# Altium PCB thru-cal-board.PcbDoc
Units mm, origin at the board's own origin, x right, y up, seen from the top; angles counter-clockwise.
Board outline 36 x 16 mm, 4 copper layers (Top Layer, Mid-Layer 1, Mid-Layer 2, Bottom Layer), stack 1.105 mm thick; 2 components, 2 nets, 10 pads, 164 vias.
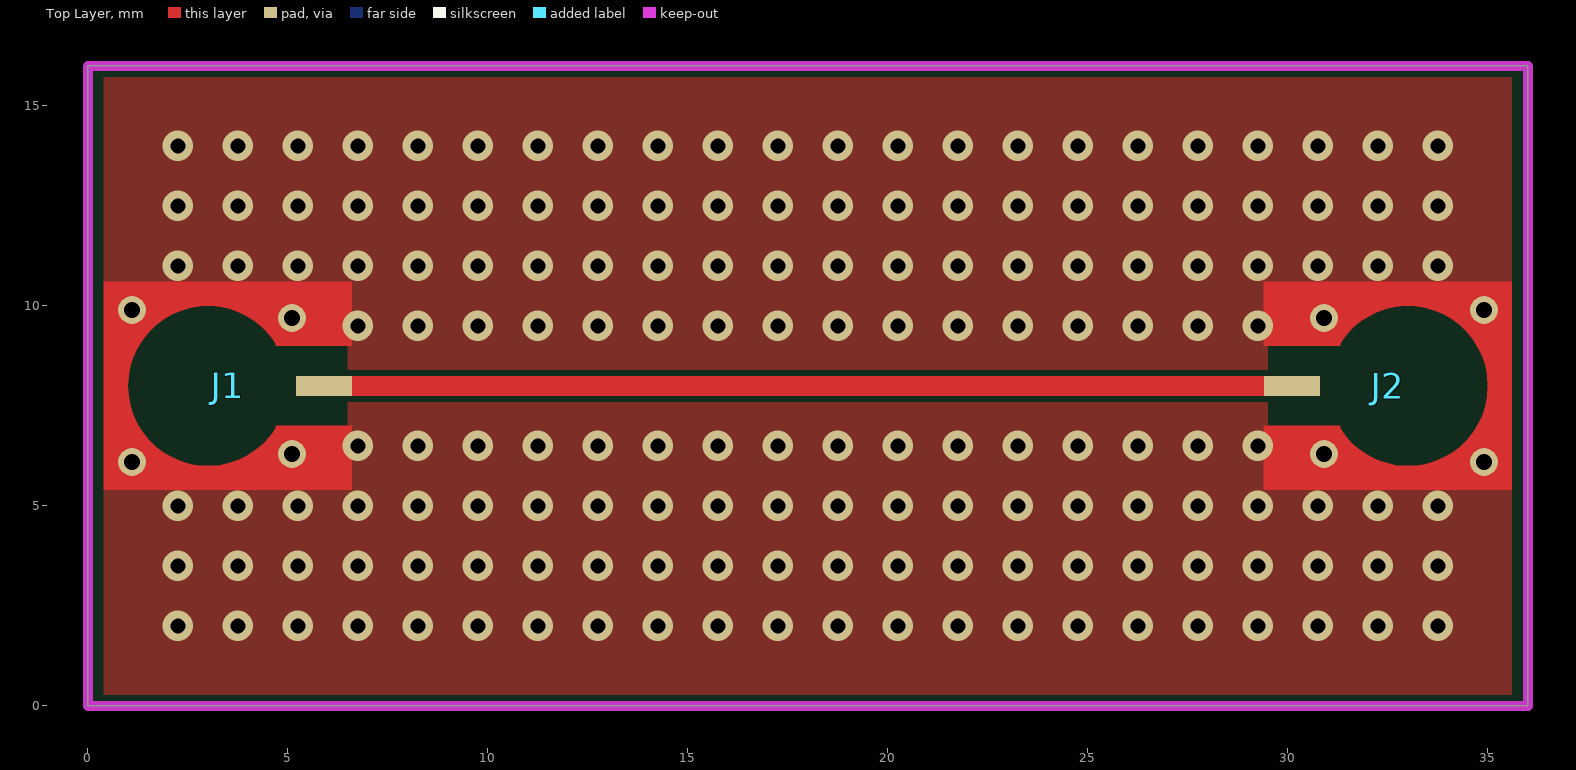
[diagram p0: Top Layer view]
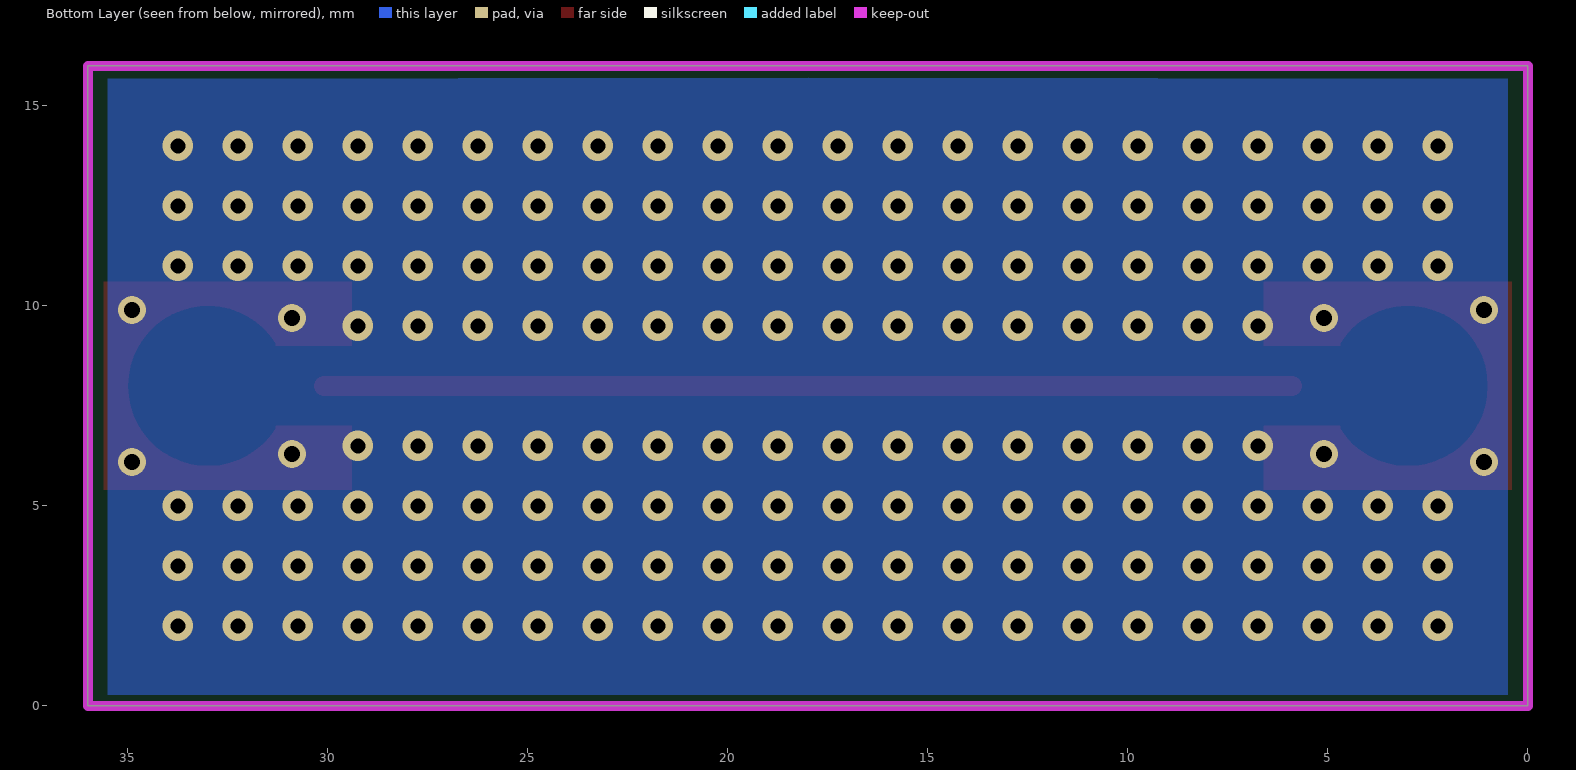
[diagram p1: Bottom Layer view, seen from below]
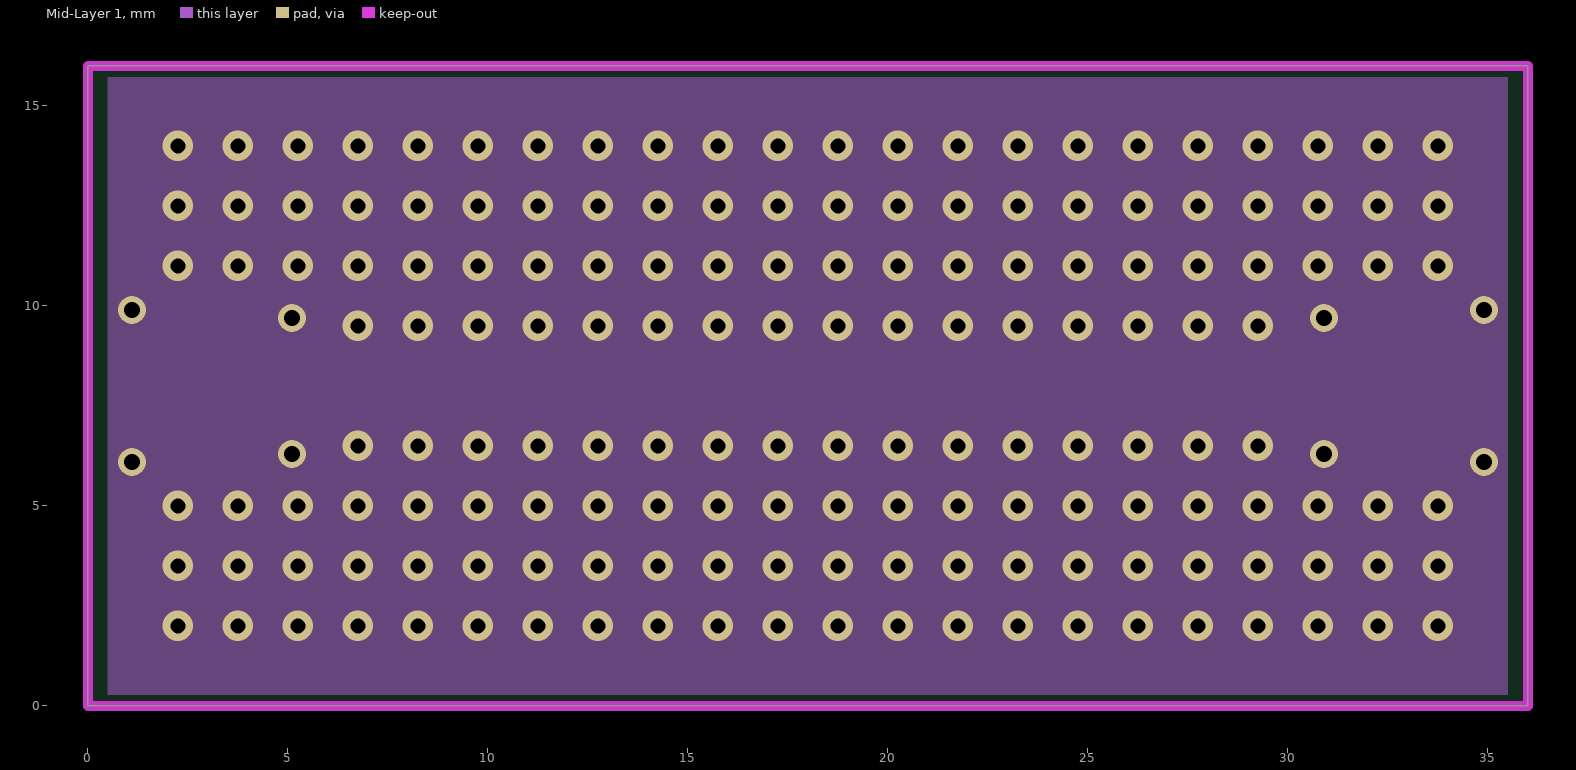
[diagram p2: Mid-Layer 1]
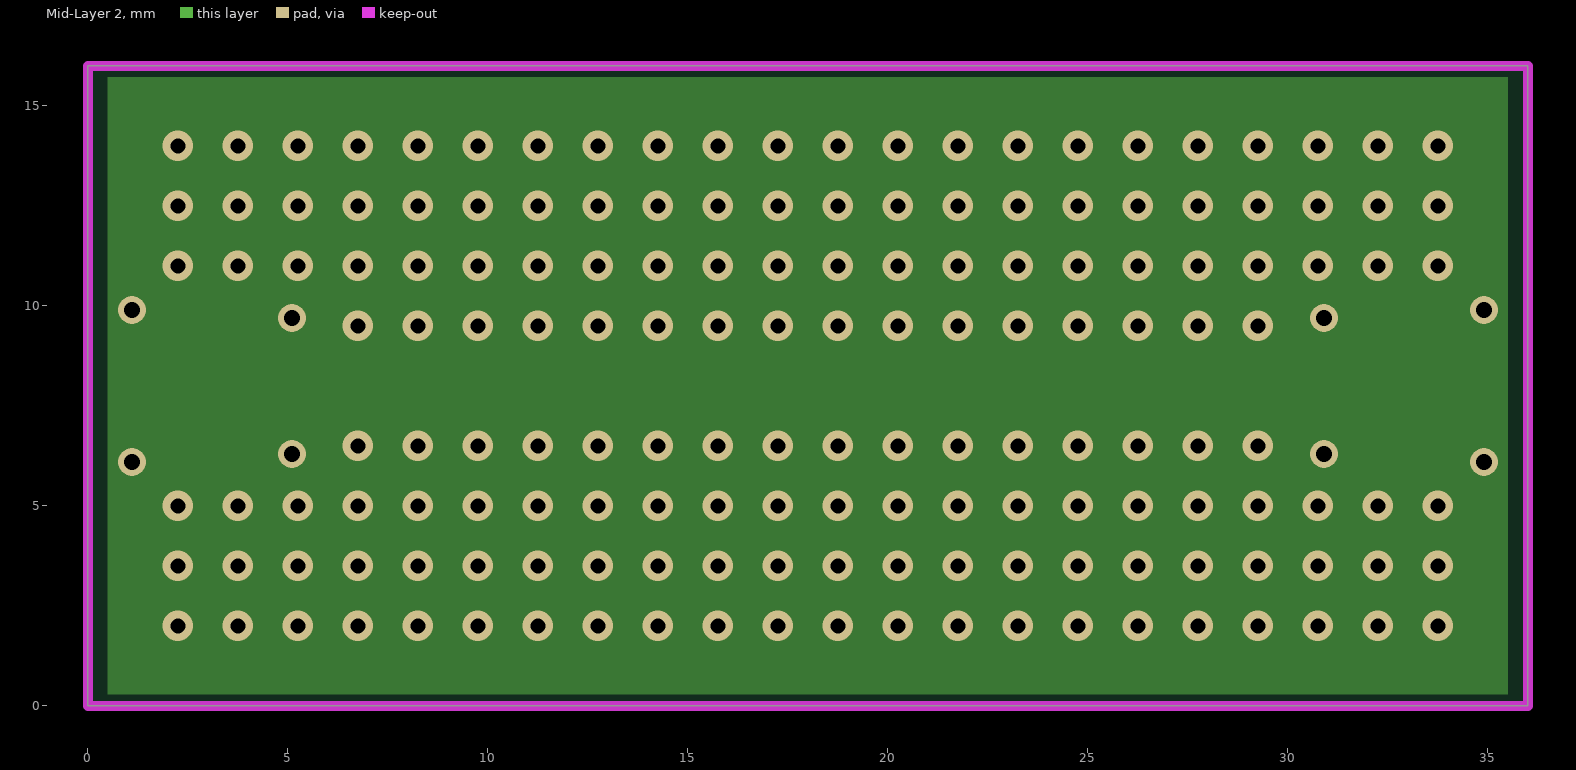
[diagram p3: Mid-Layer 2]

## Layer stack, top to bottom
Top Solder: solder mask 0.0254, SM-001, Dk 4
Top Layer: signal copper 0.035
Core1: dielectric 0.254, RO4350B, Dk 3.48
Mid-Layer 1: signal copper 0.035
Dielectric 1: prepreg 0.1778, PR7628, Dk 4.24
Dielectric 2: prepreg 0.1016, PR2116, Dk 4.17
Dielectric 3: prepreg 0.1778, PR7628, Dk 4.24
Mid-Layer 2: signal copper 0.035
Core2: dielectric 0.254, RO-4350B, Dk 3.48
Bottom Layer: signal copper 0.035
Bottom Solder: solder mask 0.0254, SM-001, Dk 4

## Board outline
0,0 36,0 36,16 0,16

## Design rules (kind name [scope] priority, off if disabled: settings)
Clearance [All] p1: gap=0.254 ignorepadtopadclearanceinfootprint=FALSE except(0: Poly-Poly Poly-Region Poly-Hole; 0.095: Track-Region SMDPad-Region Region-Region; 0.1: Track-Track Track-SMDPad SMDPad-Poly Via-Poly; 0.102: Track-Fill; 0.152: Arc-Poly Track-Poly; 0.203: Arc-SMDPad; 0.229: SMDPad-SMDPad)
PolygonConnect [All] p1: connectstyle=Direct reliefconductorwidth=0.254 reliefentries=4 polygonreliefangle="90 Angle" airgapwidth=0.254
RoutingVias [All] p1: holewidth=0.381 width=0.635 viastyle="Through Hole" minholewidth=0.127 minwidth=0.254 maxholewidth=0.711 maxwidth=1.27
SolderMaskExpansion [All] p1: expansion=0.102 istentingtop=FALSE
Width [All] p1 off: maxlimit=0.55 minlimit=0.1 preferedwidth=0.254 toplayer_prefwidth=0.1 midlayer1_minwidth=0.254 midlayer1_maxwidth=0.254 midlayer2_minwidth=0.254 midlayer2_maxwidth=0.254 bottomlayer_minwidth=0.254 bottomlayer_maxwidth=0.254 minimp=50.000000 maximp=50.000000 favimp=50.000000
Width cpw-Z-1 [All] p2 off: maxlimit=0.5 minlimit=0.174 preferedwidth=0.254 toplayer_minwidth=0.323 toplayer_prefwidth=0.406 impedanceprofiledriven=TRUE impedanceprofileid={FF6547F1-1ACB-4B88-A69B-03F59FE56022} minimp=50.000000 maximp=50.000000 favimp=50.000000
30 further rules are at their usual default settings.

## Components (designator, comment, footprint, x,y, rotation, side; value= is the part's Value field where it differs from the comment)
J1 "SMP-straight-19S141-40ML5" rosenberger-19S141-40ML5 3,8 r90 top
J2 "SMP-straight-19S141-40ML5" rosenberger-19S141-40ML5 33,8 r270 top

## Footprints (in the part's own frame and the unit in brackets; to place one, negate y for a bottom-side part, rotate by r counter-clockwise, add the part's x,y. Pads: shape width x height; smd on the part's side, far side on the other; paste and mask are expansions set on the pad)
rosenberger-19S141-40ML5 [mm]
  rect 0.5x1.4 smd: 1(0,-2.9)
  round 0.7 hole 0.4 mask+0: gnd(-1.9,1.9) gnd(-1.7,-2.1) gnd(1.7,-2.1) gnd(1.9,1.9)
  Top Layer region: -2.6,-3.6 -2.6,2.6 2.6,2.6 2.6,-3.6 1,-3.6 1,-1.696 1.06,-1.696 1.759,-0.951 2,0.042 1.718,1.024 0.988,1.739 0,2 -0.988,1.739 -1.718,1.024 -2,0.042 -1.759,-0.951 -1.06,-1.696 -1.06,-1.696 -1,-1.696 -1,-3.6
  body extent -2.5,-3.6 2.5,2.4, height 4.1

## Part data
J1 J2: "SMP Connector Plug, Male Pin 50Ohm Surface Mount Solder", Package=None, Supplier Part Number 1=476-19S201-40ML5, Availability="In Stock", Check_prices=https://www.snapeda.com/parts/853050232/Molex/view-part/?ref=eda, MF=Molex, MP=853050232, Price=None, Purchase-URL=https://pricing.snapeda.com/search/part/853050232/?ref=eda, SnapEDA_Link=https://www.snapeda.com/parts/853050232/Molex/view-part/?ref=snap, Supplier 1=Mouser

## Via types
v1: diameter 0.762, hole 0.381, Top Layer to Bottom Layer, 164 vias

## Nets (pads, with @x,y where several pads share a name; then routed paths per layer and width w, separated by ;. In a path a pad name is that pad's centre, name@x,y a point inside that pad or via, vN(x,y) a via of type N, cw(c..) or ccw(c..) an arc to the next point about the centre after c; other vN are vias at no path point)
GND: J1.gnd J2.gnd
  other v1: 2.25,2 3.75,2 5.25,2 6.75,2 8.25,2 9.75,2 11.25,2 12.75,2 14.25,2 15.75,2 17.25,2 18.75,2 20.25,2 21.75,2 23.25,2 24.75,2 26.25,2 27.75,2 29.25,2 30.75,2 32.25,2 33.75,2 2.25,3.5 3.75,3.5 5.25,3.5 6.75,3.5 8.25,3.5 9.75,3.5 11.25,3.5 12.75,3.5 14.25,3.5 15.75,3.5 17.25,3.5 18.75,3.5 20.25,3.5 21.75,3.5 23.25,3.5 24.75,3.5 26.25,3.5 27.75,3.5 29.25,3.5 30.75,3.5 32.25,3.5 33.75,3.5 2.25,5 3.75,5 5.25,5 6.75,5 8.25,5 9.75,5 11.25,5 12.75,5 14.25,5 15.75,5 17.25,5 18.75,5 20.25,5 21.75,5 23.25,5 24.75,5 26.25,5 27.75,5 29.25,5 30.75,5 32.25,5 33.75,5 6.75,6.5 8.25,6.5 9.75,6.5 11.25,6.5 12.75,6.5 14.25,6.5 15.75,6.5 17.25,6.5 18.75,6.5 20.25,6.5 21.75,6.5 23.25,6.5 24.75,6.5 26.25,6.5 27.75,6.5 29.25,6.5 6.75,9.5 8.25,9.5 9.75,9.5 11.25,9.5 12.75,9.5 14.25,9.5 15.75,9.5 17.25,9.5 18.75,9.5 20.25,9.5 21.75,9.5 23.25,9.5 24.75,9.5 26.25,9.5 27.75,9.5 29.25,9.5 2.25,11 3.75,11 5.25,11 6.75,11 8.25,11 9.75,11 11.25,11 12.75,11 14.25,11 15.75,11 17.25,11 18.75,11 20.25,11 21.75,11 23.25,11 24.75,11 26.25,11 27.75,11 29.25,11 30.75,11 32.25,11 33.75,11 2.25,12.5 3.75,12.5 5.25,12.5 6.75,12.5 8.25,12.5 9.75,12.5 11.25,12.5 12.75,12.5 14.25,12.5 15.75,12.5 17.25,12.5 18.75,12.5 20.25,12.5 21.75,12.5 23.25,12.5 24.75,12.5 26.25,12.5 27.75,12.5 29.25,12.5 30.75,12.5 32.25,12.5 33.75,12.5 2.25,14 3.75,14 5.25,14 6.75,14 8.25,14 9.75,14 11.25,14 12.75,14 14.25,14 15.75,14 17.25,14 18.75,14 20.25,14 21.75,14 23.25,14 24.75,14 26.25,14 27.75,14 29.25,14 30.75,14 32.25,14 33.75,14
NetJ1_1: J1.1 J2.1 | length 24.2
  Top Layer w0.495: J1.1 J2.1

## Polygon pours and split planes (outlines as drawn)
GND on Top Layer "NONET_L02_P-001" (solid, pour order 7): 0.4,5.4 6.6,5.4 6.6,0.285 0.4,0.285
GND on Top Layer "NONET_L02_P-001" (solid, pour order 6): 0.4,15.714 6.572,15.714 6.572,10.581 0.4,10.581
GND on Top Layer "NONET_L02_P-001" (solid, pour order 5): 29.5,15.715 35.6,15.715 35.6,10.535 29.5,10.535
GND on Top Layer "NONET_L02_P-001" (solid, pour order 4): 29.5,5.4 35.6,5.4 35.6,0.285 29.5,0.285
GND on Top Layer "GND_L01_P000" (solid, pour order 0): 6.5,0.25 29.5,0.25 29.5,15.75 6.5,15.75
GND on Mid-Layer 1 "GND_L02_P001" (solid, pour order 1): 0.5,15.722 35.5,15.722 35.5,0.263 0.5,0.263
GND on Bottom Layer "GND_L04_P003" (solid, pour order 3): 0.5,15.677 17.989,15.702 35.5,15.677 35.5,0.259 0.5,0.259
no net on Top Solder "NONET_L02_P-001" (solid): 7.108,5.468 5.839,5.468 5.839,5.079 0.064,5.079 0.064,0.079 7.108,0.079
no net on Top Solder "NONET_L02_P-001" (solid): 7.115,10.575 5.846,10.575 5.846,10.964 0.071,10.964 0.071,15.964 7.115,15.964
no net on Top Solder "NONET_L02_P-001" (solid): 28.949,10.496 30.218,10.496 30.218,10.884 35.993,10.884 35.993,15.884 28.949,15.884
no net on Top Solder "NONET_L02_P-001" (solid): 28.956,5.388 30.225,5.388 30.225,5 36,5 36,0 28.956,0
no net on Top Solder "NONET_L02_P-001" (solid): 30.226,5.388 30.226,6.991 29.497,6.991 29.497,7.593 28.956,7.593 28.956,5.388
no net on Top Solder "NONET_L02_P-001" (solid): 29.509,8.988 29.509,8.413 28.956,8.413 28.956,10.617 30.218,10.617 30.218,8.988
no net on Top Solder "NONET_L02_P-001" (solid): 5.846,10.623 5.846,9.021 6.483,9.021 6.483,8.419 7.086,8.419 7.086,10.623
no net on Top Solder "NONET_L02_P-001" (solid): 6.471,7.023 6.471,7.598 7.086,7.598 7.086,5.394 5.839,5.394 5.839,7.023
GND on Mid-Layer 2 "GND_L03_P002" (solid, pour order 2): 0.5,15.722 35.5,15.722 35.5,0.297 0.5,0.297
no net on Bottom Solder "NONET_L02_P-001" (solid): 36,16 0,16 0,0 36,0

## Keep-outs
Keep-Out Layer:
  lines w0.254: 0,0 30,0 36,0 36,16 0,16 0,0

## Silkscreen, mask and mechanical layers (free items; w line width, h text height)
Top Solder:
  rectangle: 7.008,0 29.128,16